# Altium PCB SW-SMD_MK-12C02-G025.pcbdoc
Units mm, origin at the board's own origin, x right, y up, seen from the top; angles counter-clockwise.
Board outline 21.4 x 18.48 mm, 2 copper layers (Top Layer, Bottom Layer); 1 components, 0 nets, 7 pads, 0 vias.
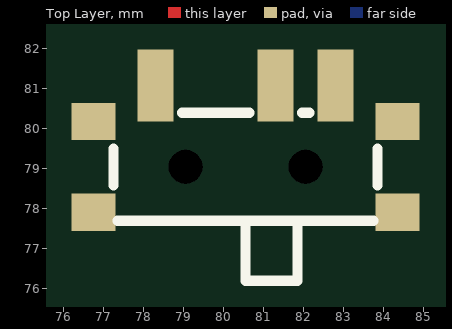
[diagram p0: Top Layer view]
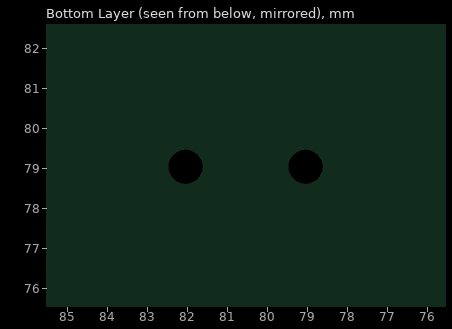
[diagram p1: Bottom Layer view, seen from below]

## Layer stack, top to bottom
Top Layer: signal copper (thickness not stored)
Dielectric: dielectric 0.32, FR-4, Dk 4.8
Bottom Layer: signal copper (thickness not stored)

## Board outline
91.25,69.85 69.85,69.85 69.85,88.333 91.25,88.333

## Components (designator, comment, footprint, x,y, rotation, side; value= is the part's Value field where it differs from the comment)
? "SW-SMD_MK-12C02-G025" SW-SMD_MK-12C02-G025 80.55,79.5 r0 top

## Footprints (in the part's own frame and the unit in brackets; to place one, negate y for a bottom-side part, rotate by r counter-clockwise, add the part's x,y. Pads: shape width x height; smd on the part's side, far side on the other; paste and mask are expansions set on the pad)
SW-SMD_MK-12C02-G025 [mm]
  rect 0.9x1.8 smd: 1(-2.25,1.583) 2(0.75,1.583) 3(2.25,1.583)
  rect 1.1x0.93 smd: 4(3.8,0.687) 5(3.8,-1.583) 6(-3.8,-1.583) 7(-3.8,0.687)
  Multi-Layer board cut-out: 1.925,-0.448 1.883,-0.264 1.765,-0.116 1.595,-0.034 1.405,-0.034 1.235,-0.116 1.117,-0.264 1.075,-0.448 1.075,-0.448 1.117,-0.633 1.235,-0.781 1.405,-0.863 1.595,-0.863 1.765,-0.781 1.883,-0.633 1.925,-0.448
  Multi-Layer board cut-out: -1.075,-0.448 -1.117,-0.264 -1.235,-0.116 -1.405,-0.034 -1.595,-0.034 -1.765,-0.116 -1.883,-0.264 -1.925,-0.448 -1.925,-0.448 -1.883,-0.633 -1.765,-0.781 -1.595,-0.863 -1.405,-0.863 -1.235,-0.781 -1.117,-0.633 -1.075,-0.448
  silkscreen extent -3.3,-3.3 3.3,0.9

## Nets (pads, with @x,y where several pads share a name; then routed paths per layer and width w, separated by ;. In a path a pad name is that pad's centre, name@x,y a point inside that pad or via, vN(x,y) a via of type N, cw(c..) or ccw(c..) an arc to the next point about the centre after c; other vN are vias at no path point)
pads on no net: ?.1 ?.2 ?.3 ?.4 ?.5 ?.6 ?.7